# Altium PCB ROS_CAR.PcbDoc (part 3 of 13)
Units mil, origin at the board's own origin, x right, y up, seen from the top; angles counter-clockwise.
Board outline 3937.01 x 3937.01 mil, 2 copper layers (Top Layer, Bottom Layer); 201 components, 155 nets, 998 pads, 0 vias.
Unrouted connection lines stored in the file: 3.
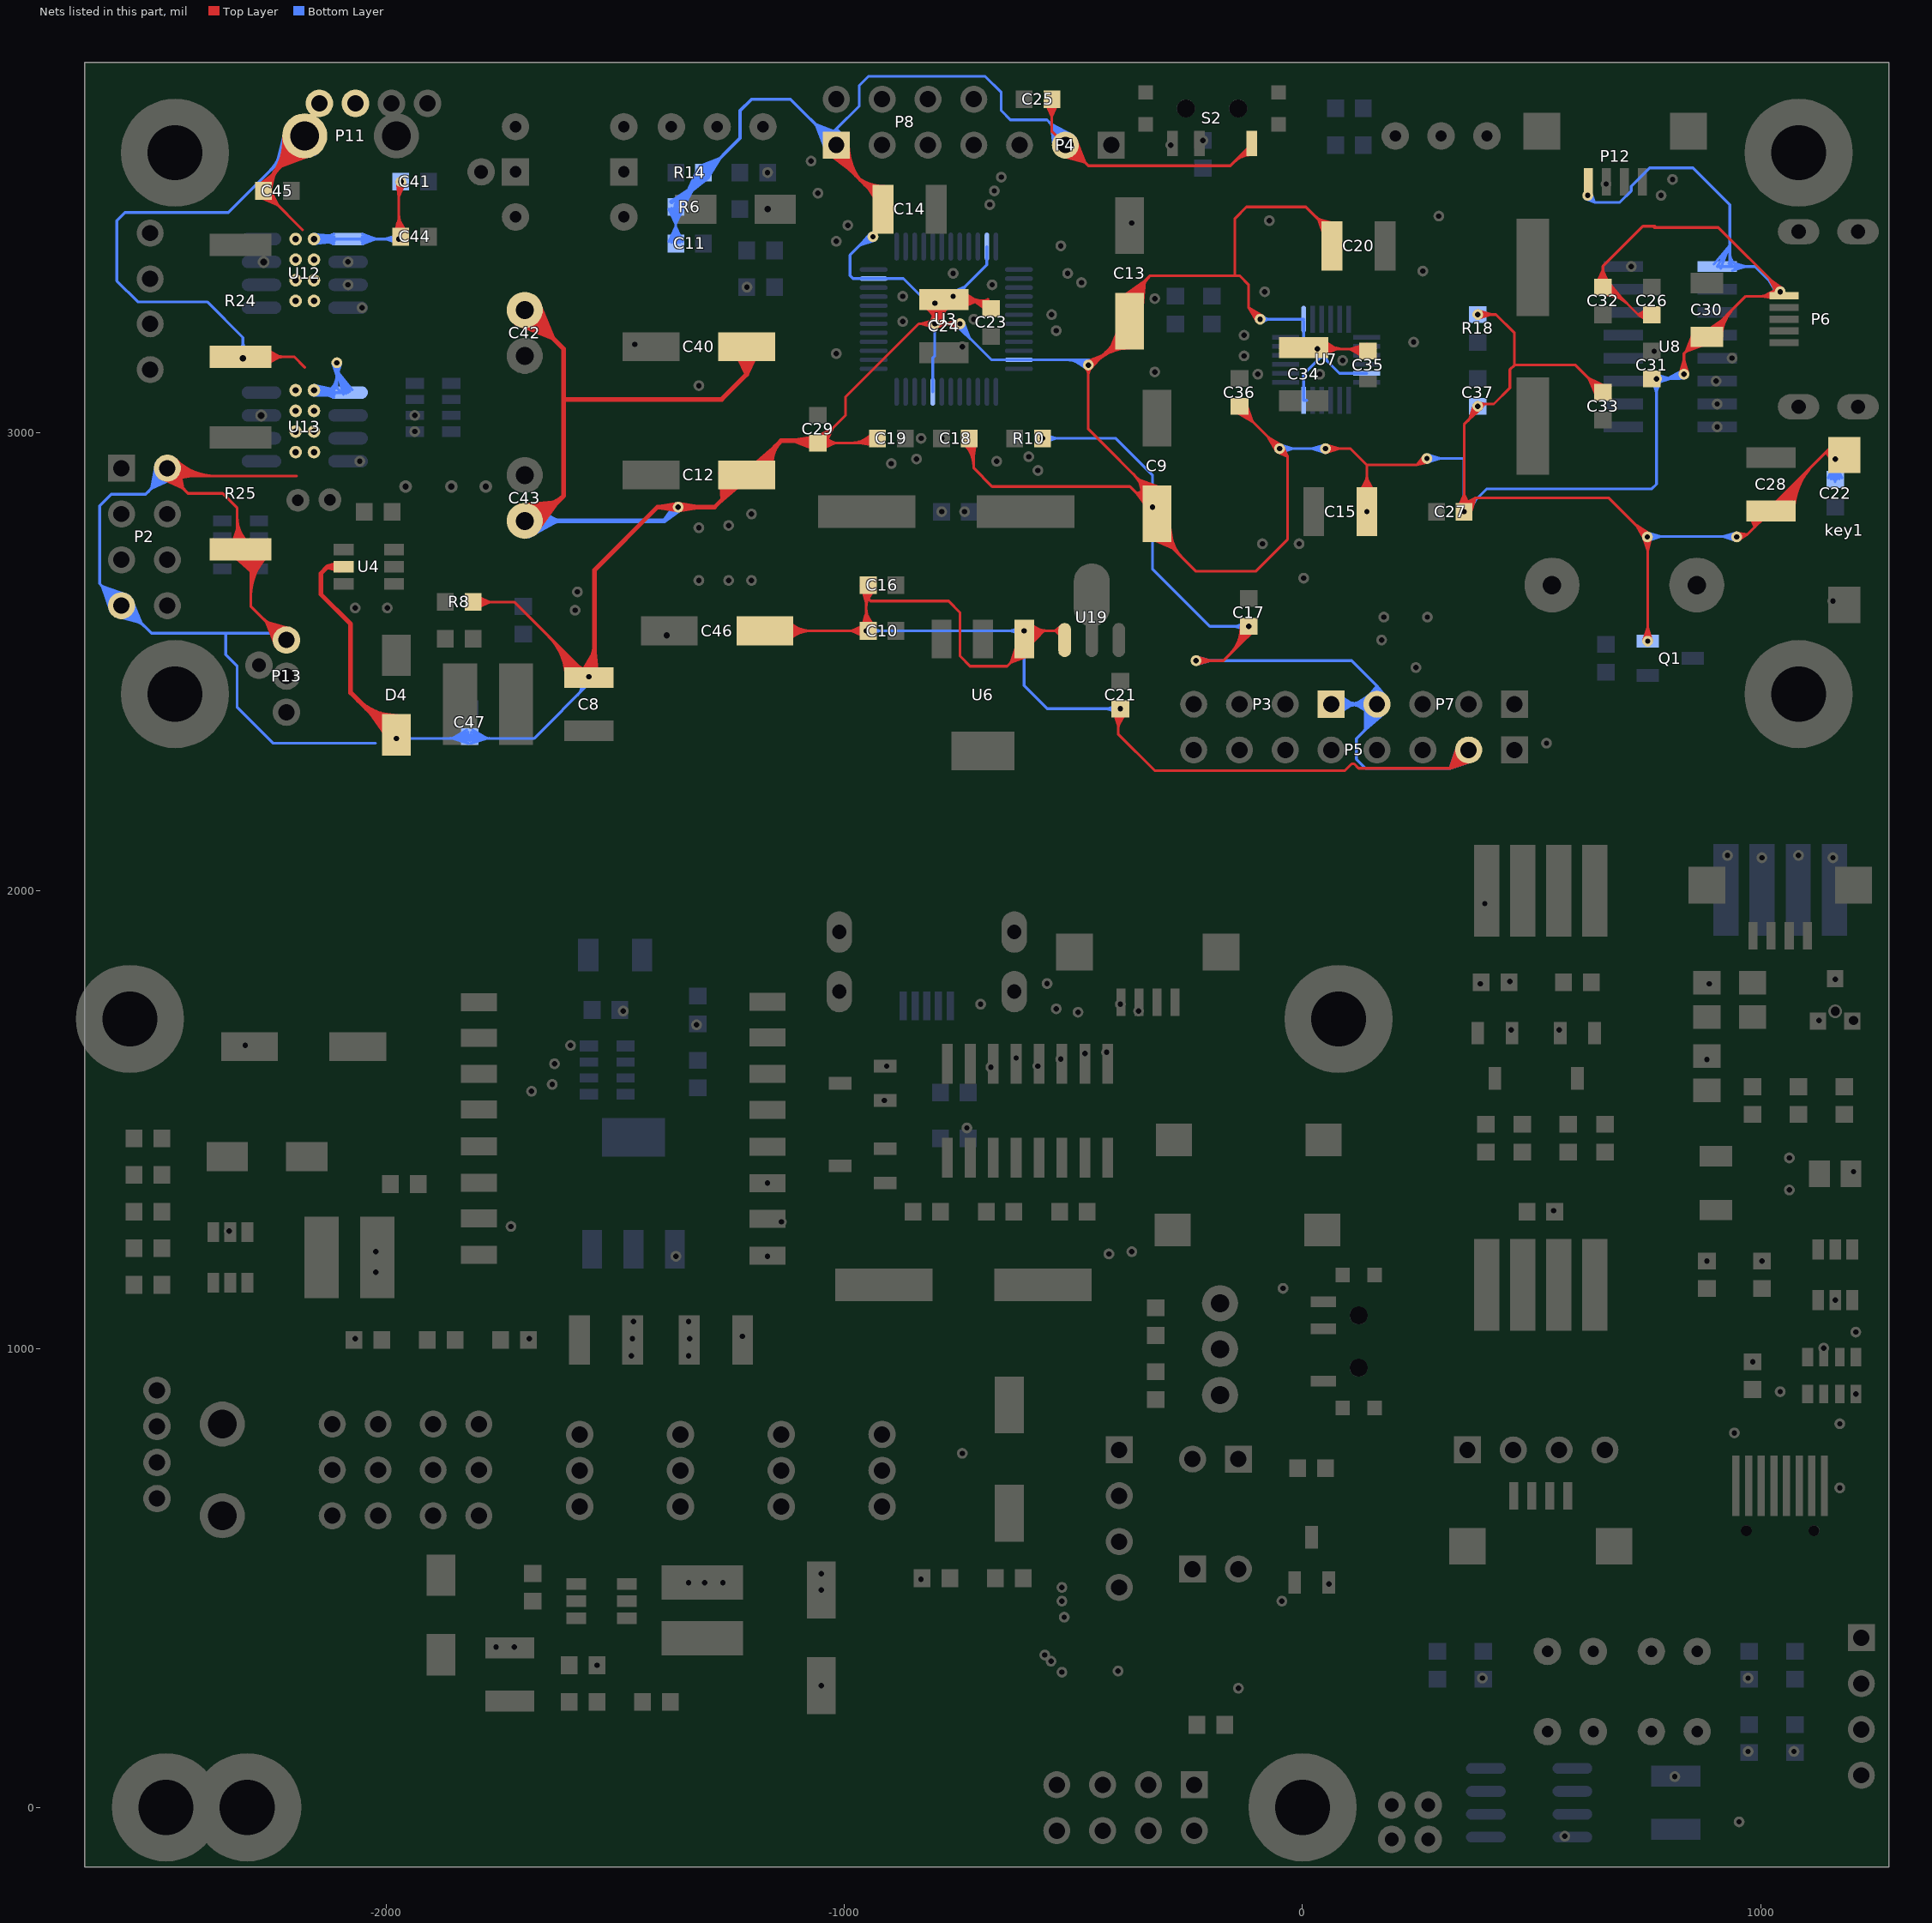
[diagram p3: the nets of this part, all layers, seen from the top]

## Nets (pads, with @x,y where several pads share a name; then routed paths per layer and width w, separated by ;. In a path a pad name is that pad's centre, name@x,y a point inside that pad or via, vN(x,y) a via of type N, cw(c..) or ccw(c..) an arc to the next point about the centre after c; other vN are vias at no path point) (continued)
CGND: (continued)
  Top Layer w6: P2.2@-2494.04,2901.36 -2442.78,2877.38 ; P2.2@-2491.14,2906.77 -2442.78,2877.38 ; P2.2@-2487.72,2911.78 -2442.78,2877.38 ; P2.2@-2483.8,2916.36 -2442.78,2877.38 ; P2.2@-2480.08,2907.79 -2424.09,2905 ; P2.2@-2480.05,2901.72 -2424.09,2905 ; P2.2@-2479.94,2919.63 ccw(c-2444.61,2954.95) -2444.61,2905 ; P2.2@-2479.45,2913.79 -2424.09,2905 ; P2.2@-2479.36,2895.63 -2424.09,2905 ; P2.2@-2477.48,2895.56 cw(c-2477.48,2855.66) -2449.27,2883.87 ; P2.2@-2477.48,2901.56 cw(c-2477.48,2876.14) -2459.51,2894.12 ; P2.2@-2477.48,2912.09 -2432.27,2866.88 -2356.88,2866.88 -2325,2835 R25.2@-2325,2745 ; P2.2@-2475.69,2923.87 ccw(c-2430.13,2969.44) -2430.13,2905 ; P2.2@-2474.27,2929.99 -2424.09,2905 ; P2.2@-2471.45,2928.12 ccw(c-2415.64,2983.93) -2415.64,2905 ; P2.2@-2471.3,2935.23 -2424.09,2905 ; P2.2@-2470.37,2926.79 -2442.78,2877.38 ; P2.2@-2469.09,2920.54 ccw(c-2442.04,2915.55) -2461.49,2896.1 ; P2.2@-2467.75,2940.16 -2424.09,2905 ; P2.2@-2467.21,2932.36 ccw(c-2401.16,2998.41) -2401.16,2905 ; P2.2@-2465,2905 -2195,2905 ; P2.2@-2464.96,2929.45 -2442.78,2877.38 ; P2.2@-2463.65,2944.72 -2424.09,2905 ; P2.2@-2463.19,2919.45 ccw(c-2428.4,2913.04) -2453.42,2888.02 ; P2.2@-2462.97,2936.6 ccw(c-2386.67,3012.9) -2386.67,2905 ; P2.2@-2459.25,2931.53 -2442.78,2877.38 ; P2.2@-2458.72,2940.84 ccw(c-2372.19,3027.38) -2372.19,2905 ; P2.2@-2457.29,2918.37 ccw(c-2414.77,2910.53) -2445.34,2879.95 ; P2.2@-2453.3,2932.99 -2442.78,2877.38 ; P2.2@-2451.39,2917.28 ccw(c-2401.14,2908.01) -2437.27,2871.88 ; R25.2@-2339.02,2746.69 -2325,2788.24 ; R25.2@-2334.85,2732.18 -2295,2696.51 ; R25.2@-2333.09,2745.14 -2325,2788.24 ; R25.2@-2332.76,2760.32 ccw(c-2351.49,2779.05) -2325,2779.05 ; R25.2@-2330.53,2736.48 -2295,2696.51 ; R25.2@-2327.07,2744.44 -2325,2788.24 ; R25.2@-2325.8,2740.24 -2295,2696.51 ; -2325,2771.9 ccw(c-2290.62,2771.9) R25.2@-2314.93,2747.59 ; -2325,2786.39 ccw(c-2276.13,2786.39) R25.2@-2310.69,2751.83 ; -2325,2800.87 ccw(c-2261.65,2800.87) R25.2@-2306.44,2756.07 ; -2325,2815.36 ccw(c-2247.16,2815.36) R25.2@-2302.2,2760.32 ; R25.2@-2321.06,2744.57 -2325,2788.24 ; R25.2@-2320.7,2743.41 -2295,2696.51 ; R24.2@-2317.48,3165.04 -2200.43,3165.04 -2177.48,3142.09 ; R25.2@-2314.16,2746.44 -2295,2696.51 ; R25.2@-2313.96,2745.8 -2325,2788.24 ; R24.2@-2312.56,3166.87 R24.2@-2280.52,3165.04 ; pad.11@-2312.48,3162.09 R24.2@-2280.52,3165.04 ; R24.2@-2311.69,3157.37 R24.2@-2280.52,3165.04 ; R24.2@-2311.66,3172.83 R24.2@-2280.52,3165.04 ; R24.2@-2309.7,3151.67 R24.2@-2280.52,3165.04 ; R24.2@-2309.1,3158.71 cw(c-2293.81,3143.42) R24.2@-2293.81,3165.04 ; R25.2@-2308.44,2748.28 -2295,2696.51 ; R25.2@-2308.25,2747.71 -2325,2788.24 ; R24.2@-2304.86,3154.46 cw(c-2279.33,3128.93) R24.2@-2279.33,3165.04 ; R24.2@-2304.86,3169.71 ccw(c-2293.58,3180.98) R24.2@-2293.58,3165.04 ; R25.2@-2302.83,2750.41 -2325,2788.24 ; R25.2@-2302.51,2749.46 -2295,2696.51 ; R25.2@-2297.76,2753.87 -2325,2788.24 ; R25.2@-2296.44,2749.97 -2295,2696.51 ; -2295,2644.02 cw(c-2173.75,2644.02) R25.2@-2259.49,2729.76 ; -2295,2658.51 cw(c-2188.23,2658.51) R25.2@-2263.73,2734 ; -2295,2672.99 cw(c-2202.72,2672.99) R25.2@-2267.97,2738.25 ; -2295,2687.48 cw(c-2217.2,2687.48) R25.2@-2272.21,2742.49 ; -2295,2701.96 cw(c-2231.69,2701.96) R25.2@-2276.46,2746.73 ; -2295,2716.45 cw(c-2246.17,2716.45) R25.2@-2280.7,2750.97 ; R25.2@-2295,2730.93 cw(c-2260.66,2730.93) R25.2@-2284.94,2755.22 ; R25.2@-2295,2745 -2295,2620 P13.1@-2225,2550 ; C45.2@-2279.1,3538.4 -2242.89,3566.68 ; C45.2@-2276.26,3513.35 -2236.64,3496.24 ; C45.2@-2275.06,3533.88 -2242.89,3566.68 ; R24.2@-2274.76,3165.04 -2232.16,3165.04 ; R24.2@-2274.61,3161.44 -2232.16,3165.04 ; R24.2@-2274.61,3168.64 -2232.16,3165.04 ; R24.2@-2273.68,3155.49 -2232.16,3165.04 ; R24.2@-2273.68,3174.58 -2232.16,3165.04 ; C45.2@-2273.47,3518.73 -2236.64,3496.24 ; R24.2@-2271.91,3149.7 -2232.16,3165.04 ; R24.2@-2271.91,3180.38 -2232.16,3165.04 ; -2271.44,2596.44 ccw(c-2217.48,2650.39) P13.1@-2217.48,2574.09 ; C45.2@-2270.51,3529.96 -2242.89,3566.68 ; C45.2@-2270.49,3528.07 cw(c-2243.91,3528.07) -2262.7,3546.86 ; C45.2@-2269.99,3523.63 -2236.64,3496.24 ; R24.2@-2269.29,3144.14 -2232.16,3165.04 ; R24.2@-2269.29,3185.94 -2232.16,3165.04 ; C45.2@-2267.8,3510.8 cw(c-2267.8,3470.7) -2239.45,3499.05 ; C45.2@-2267.8,3528.07 -2242.89,3566.68 ; C45.2@-2265.42,3528.4 -2236.64,3496.24 ; C45.2@-2264.95,3526.38 -2242.89,3566.68 ; C45.2@-2264.49,3528.07 cw(c-2223.43,3528.07) -2252.46,3557.11 ; C45.2@-2264.31,3511.2 cw(c-2259.98,3492.66) -2246.52,3506.12 cw(c-2231.34,3521.3) C45.2@-2252.62,3524.1 ; C45.2@-2264.29,3511.2 cw(c-2260.06,3493.21) -2246.99,3506.28 cw(c-2232.68,3520.59) C45.2@-2252.67,3523.73 ; R24.2@-2263.73,3154 cw(c-2237.09,3127.36) -2237.09,3165.04 cw(c-2237.09,3202.72) R24.2@-2263.73,3176.07 ; -2261.19,2586.19 ccw(c-2217.48,2629.91) P13.1@-2217.48,2568.09 ; C45.2@-2260.67,3532.09 -2236.64,3496.24 ; -2260.31,2585.31 cw(c-2298.54,2547.09) P13.1@-2244.48,2547.09 ; -2260.29,3549.28 ccw(c-2349.2,3638.19) P11.2@-2223.63,3644.69 ; R24.2@-2259.49,3149.76 cw(c-2222.6,3112.88) -2222.6,3165.04 cw(c-2222.6,3217.2) R24.2@-2259.49,3180.32 ; C45.2@-2259.5,3523.84 -2242.89,3566.68 ; C45.2@-2258.49,3528.07 cw(c-2202.94,3528.07) -2242.22,3567.35 ; C45.2@-2255.41,3535.1 -2236.64,3496.24 ; C45.2@-2253.73,3522.03 -2242.89,3566.68 ; C45.2@-2252.49,3526.1 ccw(c-2218.67,3526.1) -2242.58,3502.19 ; C45.2@-2252.49,3528.07 cw(c-2182.46,3528.07) -2231.98,3577.59 ; -2250.95,2575.95 ccw(c-2217.48,2609.42) P13.1@-2217.48,2562.09 ; -2250.75,3558.81 ccw(c-2331.07,3639.13) P11.2@-2217.64,3645.01 ; -2250.07,2575.07 cw(c-2278.06,2547.09) P13.1@-2238.48,2547.09 ; -2241.22,3568.35 ccw(c-2312.93,3640.07) P11.2@-2211.65,3645.32 ; P13.1@-2239.6,2531.6 -2261.66,2586.66 ; P13.1@-2234.04,2534.17 -2261.66,2586.66 ; -2231.68,3577.89 ccw(c-2294.8,3641.01) P11.2@-2205.66,3645.63 ; -2230.76,3578.8 cw(c-2177.48,3525.52) P11.2@-2177.48,3600.87 ; P13.1@-2228.82,2537.27 -2261.66,2586.66 ; P13.1@-2223.98,2540.86 -2261.66,2586.66 ; -2222.14,3587.42 ccw(c-2276.67,3641.95) P11.2@-2199.66,3645.94 ; -2220.52,3589.05 cw(c-2177.48,3546.01) P11.2@-2177.48,3606.87 ; P11.2@-2220.43,3664.15 -2228.62,3580.94 ; P13.1@-2217.48,2547.09 -2261.66,2586.66 ; P11.2@-2214.27,3663.31 -2228.62,3580.94 ; -2212.61,3596.96 ccw(c-2258.53,3642.89) P11.2@-2193.67,3646.25 ; P13.1@-2212,2554.23 -2261.66,2586.66 ; -2210.28,3599.29 cw(c-2177.48,3566.49) P11.2@-2177.48,3612.87 ; P13.1@-2208.97,2559.44 -2261.66,2586.66 ; P11.2@-2208.25,3662.03 -2228.62,3580.94 ; P13.1@-2206.46,2564.96 -2261.66,2586.66 ; P13.1@-2204.52,2570.77 -2261.66,2586.66 ; P11.2@-2202.39,3660.33 -2228.62,3580.94 ; P11.2@-2196.7,3658.22 -2228.62,3580.94 ; -2182.48,3442.09 -2247.17,3506.77 ; P11.2@-2172.48,3632.09 -2177.48,3632.09 -2267.8,3541.77 C45.2@-2267.8,3527.09 -2247.48,3506.77 ; P11.2@-2161.87,3631.29 -2228.62,3580.94 ; P11.2@-2158.39,3626.31 -2228.62,3580.94 ; P11.2@-2155.27,3621.06 -2228.62,3580.94 ; P11.2@-2152.52,3615.56 -2228.62,3580.94 ; P11.2@-2150.16,3609.82 -2228.62,3580.94 ; C44.2@-1983.05,3429.32 -1972.48,3464.68 ; C44.2@-1981.27,3422.66 -1974.6,3457.6 ; C44.2@-1981.25,3422.93 -1973.92,3453.31 ; C44.2@-1981.19,3423.39 -1972.48,3451.9 C44.2@-1963.77,3423.39 ; C44.2@-1981.17,3423.52 -1972,3452.04 ; C44.2@-1981.14,3423.73 -1971.03,3453.34 ; C44.2@-1981.13,3423.77 -1970.46,3455.52 ; C44.2@-1978.71,3428.32 ccw(c-1993.75,3443.36) -1972.48,3443.36 ccw(c-1951.21,3443.36) C44.2@-1966.25,3428.32 ; C44.2@-1978.62,3438.89 ccw(c-1993.44,3453.71) -1972.48,3453.71 ; C44.2@-1977.1,3428.06 -1972.48,3464.68 ; pad.1@-1976.29,3547.25 -1972.48,3514.21 ; -1972.48,3447.37 ccw(c-1948.5,3447.37) C44.2@-1965.46,3430.41 ; -1972.48,3461.85 ccw(c-1934.01,3461.85) C44.2@-1961.21,3434.65 ; -1972.48,3476.34 ccw(c-1919.53,3476.34) C44.2@-1956.97,3438.89 ; -1972.48,3513.74 cw(c-1934.14,3513.74) pad.1@-1961.25,3540.86 ; -1972.48,3528.23 cw(c-1948.62,3528.23) pad.1@-1965.49,3545.1 ; pad.1@-1972.48,3537.09 pad.1@-1972.48,3422.09 ; C44.2@-1971.09,3427.8 -1972.48,3464.68 ; C44.2@-1967.79,3428.07 -1972.48,3464.68 ; pad.1@-1967.48,3547.09 -1972.48,3514.21 ; C44.2@-1964.54,3428.64 -1972.48,3464.68 ; C44.2@-1963.82,3423.7 -1974.6,3457.6 ; C44.2@-1963.82,3423.73 -1973.92,3453.31 ; C44.2@-1963.71,3422.92 -1971.03,3453.34 ; C44.2@-1963.75,3423.24 -1972,3452.04 ; C44.2@-1963.69,3422.72 -1970.46,3455.52 ; pad.1@-1959.02,3544.62 -1972.48,3514.21 ; C44.2@-1958.79,3430.41 -1972.48,3464.68 ; C44.2@-1953.34,3433.12 -1972.48,3464.68 ; R8.2@-1810.16,2630.08 -1720.47,2630.08 pad.1@-1557.48,2467.09 ; R8.2@-1810.01,2626.78 -1773.85,2630.08 ; R8.2@-1810.01,2633.38 -1773.85,2630.08 ; R8.2@-1808.96,2620.85 -1773.85,2630.08 ; R8.2@-1808.96,2639.31 -1773.85,2630.08 ; R8.2@-1806.93,2615.12 -1773.85,2630.08 ; R8.2@-1806.93,2645.04 -1773.85,2630.08 ; R8.2@-1803.58,2623.5 cw(c-1787.69,2607.61) -1787.69,2630.08 cw(c-1787.69,2652.55) R8.2@-1803.58,2636.66 ; R8.2@-1799.33,2619.26 cw(c-1773.2,2593.12) -1773.2,2630.08 cw(c-1773.2,2667.03) R8.2@-1799.33,2640.9 ; C43.2@-1697.48,2807.09 C43.2@-1687.48,2807.09 ; -1645.13,2554.73 cw(c-1734.7,2465.16) C8.2@-1608.02,2465.16 ; -1634.88,2544.49 cw(c-1714.22,2465.16) C8.2@-1602.02,2465.16 ; -1624.64,2534.25 cw(c-1693.73,2465.16) -1596.02,2465.16 -1591.96,2501.57 ; -1614.4,2524.01 cw(c-1673.25,2465.16) C8.2@-1590.02,2465.16 ; C8.2@-1607.73,2468.54 -1591.96,2501.57 ; -1604.16,2513.76 cw(c-1652.76,2465.16) C8.2@-1584.02,2465.16 ; C8.2@-1601.97,2466.36 -1591.96,2501.57 ; -1593.91,2503.52 cw(c-1632.28,2465.16) C8.2@-1578.02,2465.16 ; C8.2@-1588.19,2465.16 -1591.96,2501.57 ; -1583.67,2493.28 cw(c-1611.79,2465.16) C8.2@-1572.02,2465.16 ; C8.2@-1580.53,2466.79 -1591.96,2501.57 ; C8.2@-1574.95,2469.16 -1591.96,2501.57 ; C8.2@-1573.43,2483.04 cw(c-1591.31,2465.16) C8.2@-1566.02,2465.16 ; C8.2@-1566.29,2467.09 ccw(c-1587.56,2467.09) -1572.52,2482.13 ccw(c-1557.48,2497.17) C8.2@-1557.48,2475.9 ; C8.2@-1564.45,2461.7 -1582.02,2491.63 C8.2@-1552.09,2474.06 ; C8.2@-1564.15,2461.33 -1583.82,2490.9 ; C8.2@-1563.48,2460.63 C8.2@-1569.75,2472.47 ; C8.2@-1563.19,2472.79 cw(c-1570.82,2465.16) C8.2@-1560.02,2465.16 ; C8.2@-1556.79,2475.87 C8.2@-1569.75,2472.47 ; C8.2@-1552.43,2474.3 -1583.82,2490.9 ; C46.2@-1173.15,2567.09 C10.1@-947.8,2567.09 -984.1,2567.09 ; C46.2@-1142.43,2562.6 -1093.14,2567.09 ; C46.2@-1142.43,2571.58 -1093.14,2567.09 ; C46.2@-1141.52,2556.65 -1093.14,2567.09 ; C46.2@-1141.52,2577.52 -1093.14,2567.09 ; C46.2@-1139.89,2550.82 -1093.14,2567.09 ; C46.2@-1139.89,2583.35 -1093.14,2567.09 ; C46.2@-1137.53,2545.18 -1093.14,2567.09 ; C46.2@-1137.53,2588.99 -1093.14,2567.09 ; C46.2@-1134.43,2539.8 -1093.14,2567.09 ; C46.2@-1134.43,2594.38 -1093.14,2567.09 ; C46.2@-1130.97,2555.42 cw(c-1102.81,2527.26) -1102.81,2567.09 cw(c-1102.81,2606.91) C46.2@-1130.97,2578.75 ; C46.2@-1126.73,2551.18 cw(c-1088.33,2512.78) -1088.33,2567.09 cw(c-1088.33,2621.4) C46.2@-1126.73,2582.99 ; C46.2@-1122.49,2546.94 cw(c-1073.84,2498.29) -1073.84,2567.09 cw(c-1073.84,2635.88) C46.2@-1122.49,2587.24 ; C29.2@-1065.43,2989.2 -1026.45,3007.81 ; C29.2@-1062.45,2983.93 -1026.45,3007.81 ; C29.2@-1058.78,2979.16 -1026.45,3007.81 ; C29.2@-1056.5,2986.08 ccw(c-1056.5,3006.17) C29.2@-1042.29,2991.96 ; C29.2@-1056.5,2992.08 ccw(c-1056.5,3026.66) -1032.05,3002.21 ; C29.2@-1056.35,2973.47 -1020.19,2976.77 ; C29.2@-1056.35,2980.08 -1020.19,2976.77 ; C29.2@-1055.3,2967.54 -1020.19,2976.77 ; C29.2@-1055.3,2986 -1020.19,2976.77 ; C29.2@-1054.03,2974.56 -1026.45,3007.81 ; C29.2@-1053.27,2961.81 -1020.19,2976.77 ; C29.2@-1053.27,2991.73 -1020.19,2976.77 ; C29.2@-1049.91,2970.19 cw(c-1034.03,2954.3) -1034.03,2976.77 cw(c-1034.03,2999.24) C29.2@-1049.91,2983.35 ; C29.2@-1049.15,2971.06 -1026.45,3007.81 ; C29.2@-1047.19,2976.77 cw(c-1022.34,2976.77) C29.2@-1039.91,2994.34 ; C29.2@-1045.67,2965.95 cw(c-1019.54,2939.82) -1019.54,2976.77 cw(c-1019.54,3013.73) C29.2@-1045.67,2987.6 ; C29.2@-1043.79,2968.24 -1026.45,3007.81 ; C29.2@-1041.19,2976.77 cw(c-1001.86,2976.77) -1029.67,3004.58 ; P8.1@-1037.56,3609.75 -987.75,3572.35 ; P8.1@-1033.66,3614.45 -987.75,3572.35 ; P8.1@-1029.35,3618.71 -987.75,3572.35 ; P8.1@-1024.68,3622.51 -987.75,3572.35 ; P8.1@-1020.95,3627.09 ccw(c-968.98,3627.09) -1005.73,3590.34 ; P8.1@-1014.95,3627.09 ccw(c-948.5,3627.09) -995.49,3580.09 ; P8.1@-1009.73,3630.64 -987.75,3572.35 ; P8.1@-1008.95,3627.09 ccw(c-928.01,3627.09) -985.25,3569.85 ; P8.1@-1003.99,3632.49 -987.75,3572.35 ; P8.1@-1002.95,3627.09 ccw(c-907.52,3627.09) -975,3559.61 ; P8.1@-998.07,3633.78 -987.75,3572.35 ; P8.1@-996.95,3627.09 ccw(c-887.04,3627.09) -964.76,3549.37 ; P8.1@-992.01,3634.5 -987.75,3572.35 ; P8.1@-990.95,3627.09 ccw(c-866.55,3627.09) -954.52,3539.12 ; -987.28,2976.77 ccw(c-987.28,3045.58) C19.1@-938.62,2996.93 ; -979.52,3564.13 ccw(c-915.55,3628.1) C14.2@-915.55,3537.63 ; -972.79,2976.77 ccw(c-972.79,3031.1) C19.1@-934.38,2992.68 ; -969.28,3553.88 ccw(c-915.55,3607.61) C14.2@-915.55,3531.63 ; C10.1@-963.05,2569.32 -952.48,2604.62 ; C16.2@-963.05,2664.86 -952.48,2629.29 ; C16.2@-962.55,2662.02 -947.8,2637.4 ; C10.1@-961.25,2567.91 -953.79,2600.23 ; C10.1@-961.19,2568.39 -952.48,2596.9 ; C10.1@-961.18,2568.47 -952.19,2596.96 ; C10.1@-961.16,2568.61 -951.58,2597.63 ; C10.1@-961.15,2568.65 -951.22,2598.88 ; C10.1@-960.61,2563.7 C10.1@-951.02,2552.12 ; C10.1@-960.61,2570.47 C10.1@-951.02,2582.05 ; -959.04,3543.64 ccw(c-915.55,3587.13) C14.2@-915.55,3525.63 ; C10.1@-958.71,2560.86 ccw(c-973.75,2545.82) -973.75,2567.09 ccw(c-973.75,2588.36) -958.71,2573.32 ccw(c-973.75,2588.36) -952.48,2588.36 ccw(c-931.21,2588.36) C10.1@-946.25,2573.32 ; C10.1@-958.62,2556.26 ccw(c-984.75,2530.13) -984.75,2567.09 ccw(c-984.75,2604.04) C10.1@-958.62,2577.91 ; C10.1@-958.62,2578.89 ccw(c-973.44,2593.71) -952.48,2593.71 ; C16.2@-958.62,2655.28 cw(c-973.44,2640.46) -952.48,2640.46 ; -958.31,2976.77 ccw(c-958.31,3016.61) C19.1@-930.13,2988.44 ; C10.1@-957.1,2568.06 -952.48,2604.62 ; C16.2@-957.1,2666.11 -952.48,2629.29 ; C16.2@-956.98,2664.59 -947.8,2637.4 ; C16.2@-956.32,2653.39 cw(c-967.05,2637.4) -947.8,2637.4 ; C10.1@-954.38,2560.51 ccw(c-970.26,2544.62) -970.26,2567.09 ccw(c-970.26,2589.56) C10.1@-954.38,2573.67 ; C10.1@-953.82,2558.38 -982.48,2567.24 ; C10.1@-953.82,2575.8 -982.48,2566.94 ; C10.1@-953.76,2575.8 -983.68,2566.98 ; C10.1@-953.69,2558.36 -983.68,2566.98 ; C10.1@-953.69,2575.81 -983.68,2567.2 ; C10.1@-952.48,2557.09 -952.48,2662.4 C16.2@-947.8,2667.09 -947.8,2637.4 ; -952.48,2587.37 ccw(c-928.5,2587.37) C10.1@-945.46,2570.41 ; -952.48,2601.85 ccw(c-914.02,2601.85) C10.1@-941.21,2574.65 ; -952.48,2616.34 ccw(c-899.53,2616.34) C10.1@-936.97,2578.89 ; -952.48,2617.84 cw(c-899.53,2617.84) C16.2@-936.97,2655.28 ; -952.48,2632.32 cw(c-914.02,2632.32) C16.2@-941.21,2659.52 ; -952.48,2646.81 cw(c-928.5,2646.81) C16.2@-945.46,2663.76 ; C10.1@-951.78,2575.87 C10.1@-938.79,2570.41 ; C10.1@-951.09,2567.8 -952.48,2604.62 ; C16.2@-951.1,2665.91 -947.8,2637.4 ; C16.2@-951.09,2666.37 -952.48,2629.29 ; C10.1@-948.99,2557.86 -984.1,2567.09 ; C10.1@-948.99,2576.32 -984.1,2567.09 ; -948.79,3533.4 ccw(c-915.55,3566.64) C14.2@-915.55,3519.63 ; C10.1@-947.95,2563.78 -984.1,2567.09 ; C10.1@-947.95,2570.39 -984.1,2567.09 ; C10.1@-947.83,2559.6 C10.1@-938.79,2570.41 ; C10.1@-947.8,2568.07 -952.48,2604.62 ; C10.1@-944.54,2568.64 -952.48,2604.62 ; C16.2@-944.54,2665.54 -952.48,2629.29 ; C16.2@-944.49,2665.91 -947.8,2637.4 ; C10.1@-943.85,2565.33 C10.1@-951.02,2552.12 ; C10.1@-943.85,2568.84 C10.1@-951.02,2582.05 ; C19.1@-943.82,2976.77 ccw(c-943.82,3002.13) C19.1@-925.89,2984.2 ; C10.1@-943.77,2568.39 -952.48,2596.9 ; C10.1@-943.8,2568.6 -953.79,2600.23 ; C10.1@-943.8,2568.61 -953.37,2597.61 ; C10.1@-943.71,2567.96 -951.22,2598.88 ; C10.1@-943.73,2568.1 -951.58,2597.63 ; C10.1@-943.73,2568.12 -952.48,2604.62 ; C10.1@-943.75,2568.3 -952.19,2596.96 ; C16.2@-939.27,2653.39 ccw(c-928.54,2637.4) -947.8,2637.4 ; C16.2@-938.78,2663.78 -952.48,2629.29 ; C16.2@-938.61,2664.59 -947.8,2637.4 ; -938.55,3523.16 ccw(c-915.55,3546.15) C14.2@-915.55,3513.63 ; C19.1@-934.23,2999.99 -966.13,2976.77 ; C10.1@-933.35,2573.13 -952.48,2604.62 ; C16.2@-933.34,2661.08 -952.48,2629.29 ; C16.2@-933.04,2662.02 -947.8,2637.4 ; C19.1@-931.05,2994.82 -966.13,2976.77 ; C19.1@-928.71,2989.28 -966.13,2976.77 ; C14.2@-928.42,3502.7 -946.83,3531.44 ; C19.1@-927.8,2986.1 -966.13,2976.77 ; C19.1@-927.13,2970.81 -966.13,2976.77 ; C19.1@-927.15,2982.86 -966.13,2976.77 ; C19.1@-926.68,2976.86 -966.13,2976.77 ; C14.2@-923.54,3506.5 -946.83,3531.44 ; C14.2@-919.49,3511.02 -946.83,3531.44 ; C19.1@-917.48,2987.09 -927.8,2976.77 C29.2@-1057.48,2976.77 -997.48,3036.77 -997.48,3077.09 -837.48,3237.09 pad.1@-752.48,3237.09 ; C14.2@-917.48,3502.09 -1017.48,3602.09 P8.1@-1017.48,3627.09 -987.75,3572.35 ; C14.2@-915.55,3517.8 -946.83,3531.44 ; C14.2@-913.26,3525.29 -946.83,3531.44 ; C14.2@-913.25,3537.5 -946.83,3531.44 ; C14.2@-912.7,3531.33 -946.83,3531.44 ; C24.2@-823.45,3273.18 cw(c-845.9,3236.02) pad.1@-802.48,3236.02 ; C24.2@-820.34,3278.32 cw(c-839.47,3246.65) pad.1@-802.48,3246.65 ; C24.2@-817.24,3283.45 cw(c-833.05,3257.29) -802.48,3257.29 ; C24.2@-814.14,3288.59 cw(c-826.62,3267.92) C24.2@-802.48,3267.92 ; pad.1@-811.19,3238.39 -802.48,3266.9 pad.1@-793.77,3238.39 ; pad.1@-811.18,3238.47 -802.2,3266.9 ; C24.2@-811.19,3280.78 -802.48,3252.28 C24.2@-793.77,3280.78 ; pad.1@-811.03,3239.24 -799.51,3266.96 ; pad.1@-810.8,3239.98 -796.72,3267.06 ; C24.2@-810.54,3285.64 C24.2@-801.85,3294.42 ; pad.1@-810.4,3240.94 -792.83,3267.02 ; pad.1@-809.87,3241.88 -788.6,3266.6 ; pad.1@-809.37,3242.59 -785.07,3265.94 ; pad.1@-808.76,3243.27 -781.23,3264.94 ; pad.1@-808.71,3230.86 ccw(c-823.75,3215.82) -823.75,3237.09 ccw(c-823.75,3258.36) -808.71,3243.32 ccw(c-823.75,3258.36) -802.48,3258.36 ccw(c-781.21,3258.36) -796.25,3243.32 ccw(c-781.21,3258.36) -781.21,3237.09 ccw(c-781.21,3215.82) pad.1@-796.25,3230.86 ; C24.2@-808.71,3275.86 cw(c-823.75,3260.82) -802.48,3260.82 cw(c-781.21,3260.82) -796.25,3275.86 cw(c-781.21,3260.82) -781.21,3282.09 cw(c-781.21,3303.36) C24.2@-796.25,3288.32 ; C24.2@-808.35,3288.66 C24.2@-795.78,3293.97 ; C24.2@-806.18,3290.08 C24.2@-789.87,3292.77 ; pad.1@-803.78,3228.37 -832.29,3237.09 pad.1@-803.78,3245.8 ; C24.2@-802.48,3268.13 cw(c-791.16,3268.13) C24.2@-799.16,3276.13 ; pad.1@-801.18,3228.37 -772.67,3237.09 pad.1@-801.18,3245.8 ; C24.2@-801.18,3273.37 -772.67,3282.09 C24.2@-801.18,3290.8 ; C24.2@-795.2,3277.12 C24.2@-789.87,3292.77 ; pad.1@-794.86,3232.67 -781.23,3264.94 ; pad.1@-794.41,3233.56 -785.07,3265.94 ; pad.1@-794.07,3234.45 -788.6,3266.6 ; C24.2@-794.1,3284.81 C24.2@-801.85,3294.42 ; C24.2@-793.82,3280.47 C24.2@-795.78,3293.97 ; pad.1@-793.8,3235.58 -792.83,3267.02 ; pad.1@-793.75,3238.31 -802.2,3266.9 ; pad.1@-793.68,3236.69 -796.72,3267.06 ; pad.1@-793.68,3237.51 -799.51,3266.96 ; C24.2@-782.48,3290.16 pad.1@-802.48,3245.44 ; C24.2@-775.61,3286.4 pad.1@-802.48,3245.44 ; C24.2@-770.78,3282.78 pad.1@-802.48,3245.44 ; C24.2@-770.78,3300.03 C24.2@-772.48,3282.09 ; C24.2@-769.98,3284.59 ccw(c-773.84,3288.45) C24.2@-769.49,3291.75 ; C24.2@-768.99,3285.58 cw(c-762.48,3279.08) C24.2@-762.48,3288.28 ; C24.2@-767.48,3287.09 C24.2@-772.48,3282.09 ; C24.2@-766.39,3278.56 pad.1@-802.48,3245.44 ; C24.2@-763.58,3288.34 C24.2@-729.07,3288.45 ; C24.2@-762.42,3288.28 C24.2@-732.17,3292.89 ; C24.2@-760.03,3305.55 C24.2@-732.17,3292.89 ; C24.2@-759.81,3305.48 C24.2@-750.44,3297.88 ; C24.2@-759.2,3305.27 C24.2@-729.07,3288.45 ; C24.2@-758.73,3289.11 C24.2@-750.44,3297.88 ; C24.2@-756.57,3290.56 C24.2@-772.48,3282.09 ; pad.1@-753.71,3230.86 ccw(c-768.75,3215.82) -768.75,3237.09 ccw(c-768.75,3258.36) pad.1@-753.71,3243.32 ; C24.2@-751.77,3290.16 -710.89,3287.09 ; C24.2@-751.61,3282.32 -710.89,3287.09 ; C24.2@-750.47,3276.38 -710.89,3287.09 ; pad.1@-748.78,3228.37 -777.29,3237.09 ; pad.1@-748.78,3245.8 -777.29,3237.09 ; C24.2@-748.43,3270.61 -710.89,3287.09 ; C24.2@-748.42,3303.58 -710.89,3287.09 ; pad.1@-747.48,3237.09 -777.29,3237.09 ; C24.2@-747.48,3287.09 C23.2@-687.17,3287.09 ; C24.2@-746.23,3295.7 ccw(c-725.44,3316.49) -725.44,3287.09 ; C24.2@-745.55,3308.99 -710.89,3287.09 ; C24.2@-741.99,3280.38 cw(c-725.79,3264.17) -725.79,3287.09 ; C24.2@-741.99,3299.94 ccw(c-710.96,3330.97) -710.96,3287.09 ; C18.1@-740.94,2979.42 -717.48,2948.63 ; C18.1@-737.99,2975.28 cw(c-787.5,2925.77) -717.48,2925.77 ; C24.2@-737.75,3276.13 cw(c-711.3,3249.69) -711.3,3287.09 ; C24.2@-737.75,3304.18 ccw(c-696.47,3345.46) C23.2@-696.47,3287.09 ; C18.1@-735.83,2982.71 -717.48,2948.63 ; C18.1@-733.75,2979.52 cw(c-773.02,2940.25) -717.48,2940.25 ; C18.1@-730.33,2985.14 -717.48,2948.63 ; C18.1@-729.5,2983.76 cw(c-758.53,2954.74) -717.48,2954.74 ; C18.1@-727.17,2986.1 -717.48,2948.63 ; C18.1@-727.17,2987.09 -727.17,2996.77 -717.48,2987.09 -717.48,2922.09 -677.48,2882.09 -376.81,2882.09 C9.2@-329.65,2834.92 ; C18.1@-725.26,2988.01 cw(c-744.05,2969.22) C18.1@-717.48,2969.22 ; -724.32,3287.09 cw(c-724.32,3231.55) C23.2@-685.05,3270.82 ; C18.1@-723.93,2986.79 -717.48,2948.63 ; -719.17,3286.79 cw(c-715.67,3262.12) C23.2@-692.62,3271.59 ; C18.1@-717.94,2987.33 -717.48,2948.63 ; -717.06,3287.09 C23.2@-684.98,3263.55 ; C18.1@-711.88,2986.93 -717.48,2948.63 ; -711.54,3287.87 cw(c-708.31,3265.15) C23.2@-687.07,3273.87 ; -707.97,3285.59 cw(c-713.44,3252.29) C23.2@-686.02,3271.97 ; -707.9,3283.96 ccw(c-702.04,3301.12) C23.2@-689.25,3288.26 ; -706.96,3283.64 cw(c-715.25,3259.34) C23.2@-692.2,3270.66 ; -706.52,3285.36 ccw(c-702.36,3310.69) -687.39,3289.84 ; -700.26,3282.87 cw(c-705.73,3261.08) C23.2@-686.45,3272.62 ; C23.2@-698.75,3280.84 ccw(c-694.44,3293.48) C23.2@-685.03,3284 ; C23.2@-691.6,3269.54 ccw(c-723.3,3250.55) -714.31,3286.4 ccw(c-705.31,3322.24) -686.33,3290.53 ; -639.36,2495.21 ccw(c-672.61,2528.46) U6.1@-625.58,2528.46 ; -637.36,2497.21 cw(c-606.93,2466.77) U6.1@-606.93,2509.81 ; -629.11,2505.45 ccw(c-652.13,2528.46) U6.1@-619.58,2528.46 ; U6.1@-627.12,2507.45 cw(c-606.93,2487.26) U6.1@-606.93,2515.81 ; U6.1@-622.84,2538.2 -636.43,2498.13 ; U6.1@-617.22,2535.83 -636.43,2498.13 ; U6.1@-612.48,2562.09 U6.1@-597.8,2576.77 ; U6.1@-612.05,2532.71 -636.43,2498.13 ; U6.1@-610.54,2567.43 -564.13,2567.09 ; U6.1@-610.19,2561.36 -564.13,2567.09 ; U6.1@-609.06,2555.44 -564.13,2567.09 ; U6.1@-607.02,2558.29 -574.46,2564.41 ; U6.1@-606.93,2528.46 -636.43,2498.13 ; U6.1@-606.93,2549.13 -564.13,2567.09 ; U6.1@-606.67,2558.31 -576.84,2565.51 ; U6.1@-606.21,2575.81 -577.67,2567.19 ; U6.1@-606.18,2558.37 -577.67,2567.09 U6.1@-606.18,2575.8 ; U6.1@-606.15,2558.38 -577.67,2567.19 ; U6.1@-605.77,2575.73 -576.84,2565.51 ; U6.1@-605.61,2575.7 -574.46,2564.41 ; U6.1@-603.92,2543.2 -564.13,2567.09 ; U6.1@-602.54,2523.46 -636.43,2498.13 ; U6.1@-602.48,2532.09 -644.57,2490 -725.39,2490 -747.48,2512.09 -747.48,2607.09 -772.48,2632.09 -942.48,2632.09 -947.8,2637.4 ; U6.1@-602.22,2574.51 ccw(c-584.31,2592.42) -584.31,2567.09 ; U6.1@-601.25,2560.86 cw(c-586.21,2545.82) -586.21,2567.09 cw(c-586.21,2588.36) U6.1@-601.25,2573.32 ; U6.1@-600.49,2538.24 -564.13,2567.09 ; U6.1@-599.28,2518.38 -636.43,2498.13 ; U6.1@-597.98,2560.86 cw(c-582.94,2545.81) -582.94,2567.09 ; U6.1@-597.98,2578.75 ccw(c-569.82,2606.91) -569.82,2567.09 ; U6.1@-596.75,2512.83 -636.43,2498.13 ; U6.1@-596.4,2533.73 -564.13,2567.09 ; U6.1@-593.74,2556.61 cw(c-568.45,2531.33) -568.45,2567.09 ; U6.1@-593.74,2582.99 ccw(c-555.34,2621.39) -555.34,2567.09 ; C25.2@-562.13,3722.88 -547.17,3689.8 ; C25.2@-557.99,3715.28 cw(c-584.12,3689.15) -547.17,3689.15 cw(c-510.21,3689.15) C25.2@-536.34,3715.28 ; C25.2@-556.4,3724.91 -547.17,3689.8 ; C25.2@-553.75,3719.52 cw(c-569.63,3703.63) -547.17,3703.63 cw(c-524.7,3703.63) C25.2@-540.58,3719.52 ; C25.2@-550.47,3725.95 -547.17,3689.8 ; C25.2@-547.17,3726.1 -547.17,3689.8 ; C25.2@-547.17,3727.09 -547.17,3656.77 P4.2@-517.48,3627.09 ; C25.2@-543.86,3725.95 -547.17,3689.8 ; C25.2@-537.94,3724.91 -547.17,3689.8 ; C25.2@-532.2,3722.88 -547.17,3689.8 ; P4.2@-530.03,3603.71 -474.18,3588.79 ; P4.2@-528.13,3609.54 -474.18,3588.79 ; P4.2@-525.66,3615.08 -474.18,3588.79 ; U19.1@-523.72,2580.43 -539.06,2567.09 ; P4.2@-522.64,3620.3 -474.18,3588.79 ; U19.1@-520.45,2575.28 -539.06,2567.09 ; U19.1@-520.02,2559.97 -539.06,2567.09 ; U19.1@-519.06,2547.09 -539.06,2567.09 ; U19.1@-519.06,2570.71 -539.06,2567.09 ; U19.1@-518.76,2565.94 -539.06,2567.09 ; P4.2@-517.21,3612.56 cw(c-516.38,3568.1) -484.94,3599.55 ; P4.2@-517.1,3606.56 cw(c-516.02,3548.51) -474.96,3589.57 ; P4.2@-511.37,3633.04 -474.18,3588.79 ; P4.2@-506.56,3636.67 -474.18,3588.79 ; P4.2@-501.37,3639.8 -474.18,3588.79 ; P4.2@-496.95,3627.09 ccw(c-459.47,3627.09) -485.97,3600.58 ; P4.2@-495.81,3642.39 -474.18,3588.79 ; P4.2@-490.95,3627.09 ccw(c-438.98,3627.09) -475.73,3590.34 ; pad.1@-473.71,3140.86 cw(c-488.75,3125.82) -467.48,3125.82 cw(c-446.21,3125.82) pad.1@-461.25,3140.86 ; pad.1@-471.46,3154.95 -437.22,3167.35 ; pad.1@-467.48,3149.9 ccw(c-467.48,3180.83) -445.61,3158.96 ; pad.1@-467.48,3155.9 ccw(c-467.48,3201.31) -435.37,3169.2 ; pad.1@-461.73,3140.41 -437.22,3167.35 ; -451.46,3153.1 cw(c-377.48,3079.12) C13.2@-377.48,3183.75 ; -441.22,3163.35 cw(c-377.48,3099.61) C13.2@-377.48,3189.75 ; -430.98,3173.59 cw(c-377.48,3120.09) C13.2@-377.48,3195.75 ; -420.74,3183.83 cw(c-377.48,3140.58) C13.2@-377.48,3201.75 ; -415.63,3188.94 ccw(c-438.94,3212.24) C13.2@-405.98,3212.24 ; C21.2@-413.7,2395.24 -402.48,2360.17 ; -410.49,3194.07 cw(c-377.48,3161.06) C13.2@-377.48,3207.75 ; C21.2@-409.29,2385.95 cw(c-425.72,2369.51) -402.48,2369.51 ; C21.2@-407.77,2396.61 -402.48,2360.17 ; C21.2@-406.28,2396.72 -400.57,2365.21 ; C21.2@-406.29,2396.84 -401.06,2367.2 ; C21.2@-406.29,2397.03 -401.68,2367.44 ; C21.2@-406.29,2397.26 -402.48,2366.64 ; C21.2@-406.28,2397.42 -403.13,2364.66 ; -402.48,2350.12 cw(c-351.81,2350.12) C21.2@-387.64,2385.95 ; -402.48,2363.74 cw(c-364.14,2363.74) C21.2@-391.25,2390.86 ; -402.48,2364.61 cw(c-366.3,2364.61) C21.2@-391.88,2390.19 ; -402.48,2378.23 cw(c-378.62,2378.23) C21.2@-395.49,2395.1 ; C21.2@-402.48,2397.09 -402.48,2342.09 -322.48,2262.09 92.52,2262.09 107.52,2277.09 112.52,2277.09 122.52,2267.09 322.52,2267.09 ; C21.2@-401.76,2396.98 -402.48,2360.17 ; C13.2@-399.22,3230.66 -417.37,3187.19 ; C21.2@-398.46,2396.77 -402.48,2360.17 ; C13.2@-398.44,3292.58 -344.69,3329.87 ; C21.2@-397.93,2388.29 C21.2@-383.93,2391.98 ; C21.2@-395.2,2396.26 -402.48,2360.17 ; C13.2@-394.72,3287.72 -344.69,3329.87 ; C13.2@-393.65,3227.89 -417.37,3187.19 ; C21.2@-392.01,2403.99 C21.2@-383.93,2391.98 ; C13.2@-390.6,3283.27 -344.69,3329.87 ; C21.2@-389.42,2394.6 -402.48,2360.17 ; C21.2@-389.03,2394.58 -401.68,2367.44 ; C21.2@-388.98,2394.77 -401.06,2367.2 ; C21.2@-388.95,2394.88 -402.48,2360.17 ; C21.2@-388.91,2395.04 -400.57,2365.21 ; C13.2@-388.56,3224.46 -417.37,3187.19 ; C13.2@-386.11,3279.24 -344.69,3329.87 ; C13.2@-384.02,3220.46 -417.37,3187.19 ; C13.2@-382.48,3267.09 -382.48,3292.09 -332.48,3342.09 ; C13.2@-381.29,3275.65 -344.69,3329.87 ; C13.2@-380.05,3215.93 -417.37,3187.19 ; C13.2@-378.94,3272.91 cw(c-346.56,3280.86) C13.2@-370.14,3304.43 ; C13.2@-377.48,3227.09 -457.48,3147.09 pad.1@-467.48,3147.09 ; C13.2@-377.48,3301.76 ccw(c-377.48,3313.06) -369.5,3305.07 ; C13.2@-375.27,3208.33 -417.37,3187.19 ; C13.2@-373.51,3271.15 -344.69,3329.87 ; C13.2@-373.11,3274.34 cw(c-334.47,3283.82) -362.61,3311.96 ; C13.2@-372.92,3202.79 -417.37,3187.19 ; C13.2@-371.29,3196.95 -417.37,3187.19 ; C13.2@-370.41,3190.89 -417.37,3187.19 ; C13.2@-370.34,3184.66 -417.37,3187.19 ; -369.1,2909.1 cw(c-424.94,2853.27) C9.2@-345.98,2853.27 ; C13.2@-368.01,3268.75 -344.69,3329.87 ; C13.2@-367.29,3275.77 cw(c-322.38,3286.79) -355.08,3319.49 ; C13.2@-362.28,3266.87 -344.69,3329.87 ; C13.2@-361.46,3277.2 cw(c-310.28,3289.76) -347.54,3327.02 ; -358.93,2898.93 ccw(c-317.48,2940.39) C9.2@-317.48,2881.76 ; -358.86,2898.86 cw(c-404.46,2853.27) C9.2@-339.98,2853.27 ; C13.2@-356.36,3265.51 -344.69,3329.87 ; C13.2@-355.63,3278.63 cw(c-298.19,3292.73) -340.01,3334.55 ; C13.2@-350.3,3264.7 -344.69,3329.87 ; -349.91,2855.19 ccw(c-327.48,2877.62) C9.2@-327.48,2845.9 ; C13.2@-349.81,3280.06 cw(c-286.09,3295.7) -332.48,3342.08 ; -348.69,2888.69 ccw(c-317.48,2919.9) C9.2@-317.48,2875.76 ; -348.62,2888.62 cw(c-383.97,2853.27) C9.2@-333.98,2853.27 ; C9.2@-342.71,2840.03 -355.98,2895.98 ; C9.2@-339.67,2844.95 ccw(c-327.48,2857.14) C9.2@-327.48,2839.9 ; C9.2@-339.46,2844.74 cw(c-347.11,2837.09) C9.2@-336.29,2837.09 ; C9.2@-338.45,2878.45 ccw(c-317.48,2899.42) C9.2@-317.48,2869.76 ; C9.2@-338.38,2878.38 cw(c-363.49,2853.27) C9.2@-327.98,2853.27 ; C9.2@-336.81,2841.77 -355.98,2895.98 ; C9.2@-336.19,2838.39 -327.48,2866.9 C9.2@-318.77,2838.39 ; C9.2@-336.07,2835.12 C9.2@-339.26,2868.76 ; C9.2@-335.86,2834.36 C9.2@-341.19,2865.03 ; C9.2@-335.51,2833.46 C9.2@-345.48,2866.28 ; C9.2@-334.97,2769.74 -282.09,2746.7 ; C9.2@-334.37,2831.6 -352.79,2861.78 ; C9.2@-334.27,2831.47 -355.97,2864.57 ; C9.2@-334.21,2831.4 -352.52,2859.87 ; C9.2@-333.94,2831.1 -353.6,2858.77 ; C9.2@-333.95,2831.11 -353.79,2859.06 ; C9.2@-333.89,2829.97 -361.7,2866.98 ; C9.2@-333.71,2843.32 ccw(c-348.75,2858.36) -327.48,2858.36 ccw(c-306.21,2858.36) C9.2@-321.25,2843.32 ; C9.2@-333.7,2830.84 -355.67,2858.95 ; C9.2@-332.81,2844.1 C9.2@-319.02,2849.04 ; C9.2@-332.21,2775.24 -282.09,2746.7 ; C9.2@-331.19,2844.1 -355.98,2895.98 ; C9.2@-329.16,2834.04 -361.7,2866.98 ; C9.2@-328.93,2780.36 -282.09,2746.7 ; C9.2@-325.89,2846.98 -355.98,2895.98 ; C9.2@-325.15,2785.08 -282.09,2746.7 ; C9.2@-325.09,2838.63 -361.7,2866.98 ; C9.2@-322.98,2844.66 -355.67,2858.95 ; C9.2@-322.78,2844.54 -353.6,2858.77 ; C9.2@-322.75,2844.52 -353.79,2859.06 ; C9.2@-322.45,2844.32 -352.52,2859.87 ; C9.2@-322.16,2844.11 -352.79,2861.78 ; C9.2@-322.11,2844.07 -355.97,2864.57 ; C9.2@-321.7,2843.66 -361.7,2866.98 ; C9.2@-320.92,2789.35 -282.09,2746.7 ; C9.2@-320.94,2850.39 -355.98,2895.98 ; C9.2@-320.64,2842.64 C9.2@-345.48,2866.28 ; C9.2@-320.2,2842.05 C9.2@-341.19,2865.03 ; C9.2@-319.69,2841.21 C9.2@-339.26,2868.76 ; C9.2@-319.09,2834.4 C9.2@-319.02,2849.04 ; C9.2@-317.83,2881.76 -361.7,2866.98 ; C9.2@-317.48,2763.75 cw(c-317.48,2719.48) -286.17,2750.78 ; C9.2@-317.48,2769.75 cw(c-317.48,2739.96) C9.2@-296.42,2761.02 ; C9.2@-317.48,2822.76 -317.48,2782.09 -232.48,2697.09 -102.48,2697.09 -32.48,2767.09 -32.48,2947.09 ; C9.2@-316.36,2857.62 -361.7,2866.98 ; C9.2@-316.24,2875.73 -361.7,2866.98 ; C9.2@-315.53,2863.58 -361.7,2866.98 ; C9.2@-315.48,2869.64 -361.7,2866.98 ; C9.2@-314.26,2856.41 -355.98,2895.98 ; C9.2@-313.83,2794.86 -282.09,2746.7 ; C9.2@-310.36,2860.98 -355.98,2895.98 ; C9.2@-308.64,2797.9 -282.09,2746.7 ; C9.2@-306.98,2792.24 ccw(c-257.12,2792.24) -292.38,2756.99 ; C9.2@-306.94,2865.96 -355.98,2895.98 ; C9.2@-304.04,2871.31 -355.98,2895.98 ; C9.2@-303.14,2800.4 -282.09,2746.7 ; C9.2@-301.7,2877 -355.98,2895.98 ; C9.2@-300.98,2792.24 ccw(c-236.64,2792.24) -282.14,2746.74 ; C9.2@-297.37,2802.32 -282.09,2746.7 ; C9.2@-294.98,2792.24 ccw(c-216.15,2792.24) -271.89,2736.5 ; C9.2@-291.36,2803.63 -282.09,2746.7 ; C9.2@-288.98,2792.24 ccw(c-195.67,2792.24) -261.65,2726.26 ; pad.1@-232.48,2502.09 -172.48,2502.09 -117.48,2557.09 ; pad.1@-231.18,2493.37 -202.67,2502.09 pad.1@-231.18,2510.8 ; pad.1@-226.25,2495.86 cw(c-211.21,2480.82) -211.21,2502.09 cw(c-211.21,2523.36) pad.1@-226.25,2508.32 ; -159.21,2515.36 ccw(c-220.63,2576.77) C17.2@-133.77,2576.77 ; -150.04,3589.53 cw(c-110.87,3550.36) S2.1@-110.87,3605.76 ; -148.97,2525.6 ccw(c-200.14,2576.77) C17.2@-127.77,2576.77 ; -147.48,3342.09 -147.48,3467.09 -122.48,3492.09 7.52,3492.09 62.52,3437.09 C20.2@62.52,3422.09 ; C36.1@-146.36,3045.06 -109.06,3023.66 ; C36.1@-142.98,3050.09 -109.06,3023.66 ; -139.79,3599.77 cw(c-110.87,3570.85) S2.1@-110.87,3611.76 ; C36.1@-138.96,3054.57 -109.06,3023.66 ; -138.73,2535.84 ccw(c-179.66,2576.77) C17.2@-121.77,2576.77 ; C36.1@-137.48,3056.77 -137.48,3052.09 -32.48,2947.09 ; C36.1@-136.5,3041.46 cw(c-136.5,3018.2) -120.04,3034.65 ; C36.1@-136.5,3056.77 -109.06,3023.66 ; C36.1@-133.87,3058.78 -109.06,3023.66 ; C17.2@-133.18,2580.99 -137.91,2536.66 ; -129.55,3610.02 cw(c-110.87,3591.33) S2.1@-110.87,3617.76 ; C36.1@-128.73,3061.9 -109.06,3023.66 ; -128.48,2546.08 ccw(c-159.17,2576.77) C17.2@-115.77,2576.77 ; C17.2@-127.22,2579.94 -137.91,2536.66 ; C36.1@-127.19,3056.77 ccw(c-91.03,3056.77) -116.6,3031.21 ; C17.2@-125.88,2579.43 -131.09,2548.42 ; C17.2@-125.79,2579.7 -131.92,2549.02 ; C17.2@-125.69,2579.97 -133.02,2549.01 ; C17.2@-125.54,2580.33 -135.24,2547.48 ; C17.2@-123.35,2570.2 cw(c-135.06,2557.09) -117.48,2557.09 ; C36.1@-123.16,3064.29 -109.06,3023.66 ; C17.2@-121.49,2578.1 -137.91,2536.66 ; C17.2@-121.25,2561.94 cw(c-122.48,2557.09) -117.48,2557.09 ; C36.1@-121.19,3056.77 ccw(c-70.55,3056.77) -106.36,3020.96 ; C17.2@-118.46,2576.77 -137.91,2536.66 ; -118.24,2556.33 ccw(c-138.68,2576.77) C17.2@-109.77,2576.77 ; C17.2@-115.54,2575.22 -137.91,2536.66 ; S2.1@-115.55,3622.03 -134.82,3604.75 ; C17.2@-113.71,2561.94 ccw(c-112.48,2557.09) -117.48,2557.09 ; C17.2@-111.61,2570.2 ccw(c-99.9,2557.09) -117.48,2557.09 ; S2.1@-110.87,3614.57 -134.82,3604.75 ; S2.1@-110.87,3628.7 -157.48,3582.09 -467.48,3582.09 -512.48,3627.09 P4.2@-517.48,3627.09 ; C17.2@-110.6,2571.27 -135.24,2547.48 ; C17.2@-110.56,2571.86 -137.91,2536.66 ; C17.2@-110.46,2571.45 -133.02,2549.01 ; C17.2@-110.31,2571.64 -131.92,2549.02 ; C17.2@-110.15,2571.88 -131.09,2548.42 ; C17.2@-109.91,2572.27 -130.6,2546.07 ; C17.2@-109.81,2572.44 -131.55,2542.87 ; S2.1@-108.96,3605.96 -134.82,3604.75 ; C17.2@-106.04,2567.83 -137.91,2536.66 ; pad.1@-101.29,3247.09 ccw(c-122.56,3247.09) -107.52,3262.13 ccw(c-92.48,3277.17) pad.1@-92.48,3255.9 ; pad.1@-99.45,3241.7 -117.02,3271.63 pad.1@-87.09,3254.06 ; pad.1@-92.48,3247.09 -117.48,3272.09 -117.48,3322.09 -137.48,3342.09 -332.48,3342.09 ; pad.1@-58.89,2964.69 ccw(c-80.16,2964.69) -65.12,2979.73 ccw(c-50.08,2994.77) pad.1@-50.08,2973.5 ; pad.1@-57.05,2959.3 -74.62,2989.23 ; pad.1@-55.11,2957.45 -32.48,2947.09 ; pad.1@-50.08,2955.88 cw(c-50.08,2934.61) -35.04,2949.65 cw(c-20,2964.69) pad.1@-41.27,2964.69 ; pad.1@-50.08,2964.69 -74.62,2989.23 ; pad.1@-44.69,2971.66 -74.62,2989.23 ; pad.1@-42.85,2969.72 -32.48,2947.09 ; 26.09,3473.52 ccw(c64.45,3511.88) C20.2@64.45,3457.63 ; 32.45,3467.15 cw(c3.1,3437.8) C20.2@44.61,3437.8 ; C34.2@33.09,3190.88 66.16,3184.33 ; C34.2@33.11,3173.3 65.72,3179.89 ; C34.2@33.23,3185.49 74.14,3182.09 ; C34.2@33.33,3177.66 74.14,3182.09 ; C34.2@33.45,3173.32 63.01,3180.88 ; C34.2@33.53,3190.84 62.74,3183.04 ; C34.2@33.82,3173.37 62.33,3182.09 C34.2@33.82,3190.8 ; C34.2@34.08,3173.41 62.74,3183.04 ; C34.2@34.14,3190.75 63.01,3180.88 ; C34.2@34.25,3173.45 66.16,3184.33 ; C34.2@34.26,3190.72 65.72,3179.89 ; C34.2@34.42,3171.71 74.14,3182.09 ; C34.2@34.62,3193.2 74.14,3182.09 ; 36.33,3463.28 ccw(c64.45,3491.4) C20.2@64.45,3451.63 ; C34.2@36.41,3165.91 74.14,3182.09 ; C34.2@36.68,3198.89 74.14,3182.09 ; C34.2@38.75,3175.86 cw(c53.79,3160.82) 53.79,3182.09 cw(c53.79,3203.36) C34.2@38.75,3188.32 ; C34.2@38.77,3191.03 ccw(c60.36,3212.63) 60.36,3182.09 ; C34.2@39.6,3204.28 74.14,3182.09 ; C20.2@42.7,3456.91 cw(c23.58,3437.8) C20.2@50.61,3437.8 ; C34.2@43.01,3175.71 cw(c58.41,3160.31) 58.41,3182.09 ; C34.2@43.01,3195.27 ccw(c74.85,3227.11) 74.85,3182.09 ; C20.2@46.57,3453.03 ccw(c64.45,3470.91) C20.2@64.45,3445.63 ; C34.2@47.25,3171.47 cw(c72.89,3145.83) 72.89,3182.09 ; C34.2@47.25,3199.52 ccw(c89.33,3241.6) 89.33,3182.09 ; C20.2@47.89,3426.88 34.73,3464.88 ; pad.1@50.12,2964.69 104.92,2964.69 140.59,2929.02 ; pad.1@51.42,2955.97 79.93,2964.69 pad.1@51.42,2973.4 ; C20.2@53.51,3429.32 34.73,3464.88 ; pad.1@56.35,2958.46 cw(c71.39,2943.42) 71.39,2964.69 cw(c71.39,2985.96) pad.1@56.35,2970.92 ; C20.2@58.63,3432.55 34.73,3464.88 ; C20.2@64.45,3437.8 34.73,3464.88 ; C20.2@69.14,3444.07 34.73,3464.88 ; C20.2@71.87,3449.47 34.73,3464.88 ; C20.2@73.78,3455.3 34.73,3464.88 ; 93.27,3182.09 cw(c93.27,3129.14) C35.1@130.71,3166.58 ; 107.76,3182.09 cw(c107.76,3143.62) C35.1@134.95,3170.82 ; 115.89,3182.09 ccw(c115.89,3203.05) C35.1@130.71,3188.23 ; C15.2@121.35,2862.61 140.59,2898.63 ; 122.24,3182.09 cw(c122.24,3158.11) C35.1@139.2,3175.06 ; C15.2@126.57,2871.82 ccw(c92.71,2905.68) 140.59,2905.68 ccw(c188.48,2905.68) C15.2@154.62,2871.82 ; C15.2@126.96,2860.14 140.59,2898.63 ; C35.1@127.52,3182.09 pad.1@32.52,3182.09 ; C15.2@130.81,2867.58 ccw(c107.19,2891.2) 140.59,2891.2 ccw(c173.99,2891.2) C15.2@150.37,2867.58 ; C15.2@131.88,2828.39 140.59,2856.9 C15.2@149.3,2828.39 ; C15.2@132.79,2858.55 140.59,2898.63 ; C15.2@134.36,2833.32 ccw(c119.32,2848.36) 140.59,2848.36 ccw(c161.86,2848.36) C15.2@146.82,2833.32 ; C35.1@136.64,3162.9 103.75,3182.09 ; C35.1@139.27,3168.37 103.75,3182.09 ; C35.1@140.33,3192.66 103.75,3182.09 ; C15.2@140.59,2827.09 140.59,2929.02 ; C15.2@140.59,2857.8 140.59,2898.63 ; C35.1@140.99,3174.14 103.75,3182.09 ; C35.1@141.54,3177.4 103.75,3182.09 ; C35.1@141.54,3186.71 103.75,3182.09 ; C35.1@141.8,3180.7 103.75,3182.09 ; C15.2@148.39,2858.55 140.59,2898.63 ; C15.2@154.23,2860.14 140.59,2898.63 ; C15.2@159.83,2862.61 140.59,2898.63 ; pad.1@262.88,2945.07 cw(c242.09,2949.58) 253.6,2931.69 cw(c265.12,2913.8) pad.1@269.62,2934.59 ; pad.1@265.54,2949.71 249.45,2929.02 ; pad.1@271.49,2943.2 249.45,2929.02 ; pad.1@274.95,2935.1 249.45,2929.02 ; P5.2@336.1,2304.66 cw(c289.26,2300.35) 322.52,2267.09 ; C27.2@337.87,2831.3 352.83,2864.38 ; P5.2@339.89,2320.92 322.52,2267.09 ; C27.2@342.01,2838.89 ccw(c315.88,2865.03) 352.83,2865.03 ccw(c389.79,2865.03) C27.2@363.66,2838.89 ; P5.2@342.08,2305.21 cw(c305.83,2301.88) 331.57,2276.14 cw(c357.31,2250.39) P5.2@360.64,2286.65 ; C27.2@342.52,2822.09 377.52,2857.09 ; C27.2@343.41,2840.13 377.52,2857.09 ; C27.2@343.6,2829.26 352.83,2864.38 ; C27.2@343.76,2828.02 351.53,2859.43 ; C27.2@343.79,2828.28 352.18,2857.21 ; C27.2@343.85,2828.64 353.48,2857.34 ; C27.2@343.85,2828.68 354.06,2859.72 ; P5.2@345.61,2318.73 322.52,2267.09 ; C27.2@346.29,2833.32 ccw(c330.49,2849.12) 352.83,2849.12 ; C27.2@346.25,2834.65 ccw(c330.37,2850.54) 352.83,2850.54 ccw(c375.3,2850.54) C27.2@359.42,2834.65 ; C27.2@346.33,2833.36 374.45,2854.89 ; C27.2@346.54,2833.56 373.84,2852.77 ; C27.2@346.54,2834.92 377.52,2857.09 ; C27.2@346.63,2833.64 374.34,2852.61 ; C27.2@346.69,2833.69 375.72,2853.46 ; P5.2@348.05,2305.76 cw(c322.4,2303.4) 340.62,2285.18 cw(c358.83,2266.96) P5.2@361.19,2292.62 ; C27.2@349.53,2828.22 352.83,2864.38 ; C27.2@350.41,2830.32 377.52,2857.09 ; P5.2@351.01,2315.95 322.52,2267.09 ; C27.2@352.52,2835.9 ccw(c352.52,2845.1) C27.2@359.03,2838.59 ; C27.2@352.83,2827.09 352.83,3017.4 397.52,3062.09 ; C27.2@352.83,2843.38 ccw(c352.83,2869.88) 371.57,2851.14 ; 352.83,2847.6 ccw(c373.03,2847.6) C27.2@358.75,2833.32 ; C27.2@355.33,2827.09 cw(c374.19,2827.09) C27.2@360.85,2840.42 ; C27.2@355.44,2826.04 377.52,2857.09 ; P5.2@356.05,2312.64 322.52,2267.09 ; C27.2@356.14,2828.22 352.83,2864.38 ; C27.2@359.81,2822.14 375.72,2853.46 ; C27.2@359.91,2822.29 374.34,2852.61 ; C27.2@359.98,2822.4 373.84,2852.77 ; P5.2@360.09,2280.67 ccw(c355.79,2233.82) 322.52,2267.09 ; C27.2@360.06,2822.53 374.45,2854.89 ; 360.41,3024.97 ccw(c328.29,3057.09) pad.1@373.71,3057.09 ; C27.2@360.61,2822.95 377.52,2857.09 ; C27.2@361.22,2828.47 352.18,2857.21 ; C27.2@361.21,2828.55 351.53,2859.43 ; C27.2@361.27,2828.09 353.48,2857.34 ; C27.2@361.33,2827.09 cw(c394.67,2827.09) 371.1,2850.66 ; C27.2@361.3,2827.86 354.06,2859.72 ; C27.2@362.08,2829.15 cw(c385.23,2831.84) 368.75,2848.32 ; C27.2@362.06,2829.26 352.83,2864.38 ; P5.2@362.52,2307.09 322.52,2267.09 ; C27.2@366.25,2820.7 377.52,2857.09 ; C27.2@367.8,2831.3 352.83,2864.38 ; C27.2@368.04,2829.84 cw(c400.94,2833.67) 377.52,2857.09 ; P5.2@368.08,2300.62 322.52,2267.09 ; 370.65,3035.22 ccw(c348.78,3057.09) pad.1@379.71,3057.09 ; P5.2@371.39,2295.58 322.52,2267.09 ; P5.2@374.16,2290.18 322.52,2267.09 ; pad.1@374.58,3060.9 363.89,3028.45 ; P5.2@376.36,2284.45 322.52,2267.09 ; pad.1@382.17,3065.89 397.52,3062.09 ; pad.1@382.52,3257.4 422.2,3257.4 462.52,3217.09 462.52,3147.09 ; pad.1@383.82,3248.69 412.33,3257.4 pad.1@383.82,3266.12 ; pad.1@387.52,3049.84 397.52,3062.09 ; pad.1@388.75,3251.17 cw(c403.79,3236.13) 403.79,3257.4 cw(c403.79,3278.67) pad.1@388.75,3263.63 ; pad.1@389.22,3051.37 363.89,3028.45 ; pad.1@392.52,3057.09 pad.1@382.52,3057.09 ; 627.7,3115.21 cw(c599.89,3087.4) C33.1@639.22,3087.4 ; 630.08,3112.84 ccw(c654.53,3137.29) C33.1@654.53,3102.71 ; C33.1@637.94,3104.97 cw(c620.38,3087.4) C33.1@645.22,3087.4 ; C33.1@640.32,3102.59 ccw(c654.53,3116.8) C33.1@654.53,3096.71 ; C32.1@640.55,3320.63 655.51,3353.71 ; C33.1@641.82,3078.87 624.48,3118.44 ; C32.1@644.69,3328.23 ccw(c618.56,3354.36) 655.51,3354.36 ccw(c692.47,3354.36) C32.1@666.34,3328.23 ; C32.1@646.28,3318.59 655.51,3353.71 ; C33.1@647.18,3081.69 624.48,3118.44 ; C32.1@648.93,3323.98 ccw(c633.04,3339.87) 655.51,3339.87 ccw(c677.98,3339.87) C32.1@662.09,3323.98 ; C32.1@650.92,3303.15 695.79,3293.82 ; C33.1@652.07,3085.19 624.48,3118.44 ; C32.1@652.21,3317.55 655.51,3353.71 ; C32.1@652.54,3308.98 695.79,3293.82 ; C33.1@654.53,3087.4 624.48,3118.44 ; C32.1@654.9,3314.51 695.79,3293.82 ; C33.1@655.51,3087.4 595.83,3147.09 462.52,3147.09 ; C32.1@656.5,3302.09 cw(c656.5,3227.22) 709.44,3280.16 ; C32.1@656.5,3308.09 cw(c656.5,3247.7) 699.2,3290.41 ; C32.1@656.5,3314.09 cw(c656.5,3268.19) 688.96,3300.65 ; C32.1@656.5,3317.4 695.79,3293.82 ; C32.1@656.5,3320.09 cw(c656.5,3288.67) 678.72,3310.89 ; C33.1@656.81,3089.79 624.48,3118.44 ; C32.1@658.3,3320.17 695.79,3293.82 ; C32.1@658.82,3317.55 655.51,3353.71 ; C33.1@660.48,3094.56 624.48,3118.44 ; C32.1@662.07,3324.85 695.79,3293.82 ; C33.1@663.46,3099.83 624.48,3118.44 ; C32.1@664.74,3318.59 655.51,3353.71 ; C32.1@666.45,3329.03 695.79,3293.82 ; C32.1@670.47,3320.63 655.51,3353.71 ; 736.36,2789.82 cw(c718.64,2772.09) pad.1@743.71,2772.09 ; 740.17,2786.01 ccw(c752.52,2798.37) pad.1@752.52,2780.9 ; pad.1@743.84,2770.56 753.31,2742.25 ; pad.1@744.59,2545.79 753.31,2574.3 pad.1@762.02,2545.79 ; pad.1@745.38,2766.93 728.86,2797.32 ; pad.1@746.29,2765.86 cw(c729.35,2748.91) 753.31,2748.91 ; pad.1@747.08,2550.72 ccw(c732.04,2565.76) 753.31,2565.76 ccw(c774.58,2565.76) pad.1@759.54,2550.72 ; C26.1@748.82,3248.24 ccw(c732.84,3237.52) 732.84,3256.77 ; C26.1@748.82,3265.3 cw(c732.84,3276.02) 732.84,3256.77 ; pad.1@753.31,2544.49 753.31,2772.87 669.09,2857.09 377.52,2857.09 ; 753.31,2752.72 cw(c771.89,2752.72) pad.1@758.75,2765.86 ; C26.1@757.45,3242.02 732.83,3256.77 ; C26.1@757.45,3271.52 732.83,3256.77 ; pad.1@758.13,2778.88 728.86,2797.32 ; C26.1@760.03,3247.59 732.83,3256.77 ; C26.1@760.03,3265.96 732.83,3256.77 ; pad.1@761.27,2771.02 753.31,2742.25 ; C26.1@761.35,3253.47 732.83,3256.77 ; C26.1@761.35,3260.07 732.83,3256.77 ; C26.1@761.54,3256.77 732.83,3256.77 ; C26.1@762.52,3256.77 732.83,3256.77 ; 767.52,3447.09 907.52,3447.09 pad.1@1042.52,3312.09 ; 769.53,3450.08 742.94,3450.08 655.51,3362.65 C32.1@655.51,3317.4 672.2,3317.4 732.83,3256.77 ; pad.1@823.81,3128.39 832.52,3156.9 pad.1@841.23,3128.39 ; pad.1@826.29,3133.32 ccw(c811.25,3148.36) 832.52,3148.36 ccw(c853.79,3148.36) pad.1@838.75,3133.32 ; pad.1@832.52,3127.09 832.52,3172.09 868.86,3208.43 C30.2@882.52,3208.43 882.52,3212.09 967.52,3297.09 1032.52,3297.09 pad.1@1042.52,3307.09 ; 835.67,3175.24 cw(c869.33,3141.58) C30.2@869.33,3189.18 ; 836.81,3176.38 ccw(c804.77,3208.43) C30.2@850.09,3208.43 ; 845.92,3185.48 cw(c869.33,3162.07) C30.2@869.33,3195.18 ; 847.06,3186.62 ccw(c825.25,3208.43) C30.2@856.09,3208.43 ; C30.2@853.27,3219.02 836.36,3175.92 ; C30.2@858.78,3216.43 836.36,3175.92 ; C30.2@863.86,3213.17 836.36,3175.92 ; C30.2@869.33,3208.43 836.36,3175.92 ; C30.2@874,3202.88 836.36,3175.92 ; C30.2@877.18,3197.76 836.36,3175.92 ; C30.2@879.7,3192.21 836.36,3175.92 ; C30.2@881.34,3221.23 915.25,3244.82 ; C30.2@885.2,3216.48 915.25,3244.82 ; C30.2@889.65,3212.4 915.25,3244.82 ; C30.2@895.71,3208.43 915.25,3244.82 ; C30.2@896.95,3208.43 cw(c940.64,3208.43) 909.75,3239.31 ; C30.2@902.37,3205.57 915.25,3244.82 ; C30.2@902.95,3208.43 cw(c961.12,3208.43) 919.99,3249.56 ; C30.2@908.23,3204.11 915.25,3244.82 ; C30.2@908.95,3208.43 cw(c981.61,3208.43) 930.23,3259.8 ; C30.2@914.32,3203.52 915.25,3244.82 ; C30.2@914.95,3208.43 cw(c1002.09,3208.43) 940.48,3270.04 ; pad.1@947.29,2780.89 970.59,2777.09 ; pad.1@947.52,2772.09 970.59,2777.09 ; pad.1@950,2770.76 cw(c960.57,2765.09) 960.57,2777.09 ; pad.1@950.96,2763.98 970.59,2777.09 ; pad.1@952.52,2777.09 970.59,2777.09 ; pad.1@955.29,2767.92 cw(c970.59,2759.72) 970.59,2777.09 ; C28.1@972.18,2826.16 986.96,2793.45 ; C28.1@978,2828.21 986.96,2793.45 ; C28.1@983.98,2829.22 986.96,2793.45 ; C28.1@991.81,2829.02 986.96,2793.45 ; 997.11,3297.09 ccw(c997.11,3352.5) pad.1@1036.29,3313.32 ; C28.1@999.41,2827.12 986.96,2793.45 ; C28.1@1004.9,2824.54 986.96,2793.45 ; C28.1@1009.96,2821.01 986.96,2793.45 ; 1011.59,3297.09 ccw(c1011.59,3338.02) pad.1@1040.53,3309.07 ; 1012.78,3297.09 ccw(c1012.78,3312.89) P6.1@1023.96,3301.72 ; C28.1@1017.52,2832.09 1142.52,2957.09 ; 1018.49,3297.09 cw(c1018.49,3289.36) P6.1@1023.96,3294.82 ; C28.1@1019.06,2829.02 cw(c1030.2,2829.02) C28.1@1022.33,2836.89 ; C28.1@1022.52,2829.02 970.59,2777.09 ; 1023.94,3330.66 cw(c1000.37,3307.09) pad.1@1033.71,3307.09 ; C28.1@1025.06,2829.02 cw(c1050.69,2829.02) C28.1@1032.57,2847.14 ; P6.1@1026.08,3297.09 ccw(c1026.08,3323.53) P6.1@1044.77,3304.83 ; P6.1@1026.72,3303.1 1001.51,3297.09 ; P6.1@1027.17,3293.4 1001.51,3297.09 ; P6.1@1027.4,3298.27 1001.51,3297.09 ; C28.1@1031.06,2829.02 cw(c1071.17,2829.02) 1042.81,2857.38 ; C28.1@1034.09,2834.21 1053.56,2868.13 ; 1034.19,3320.42 cw(c1020.85,3307.09) pad.1@1039.71,3307.09 ; P6.1@1035.04,3302.42 1020.41,3334.2 ; 1036.01,3318.59 ccw(c1042.52,3325.1) pad.1@1042.52,3315.9 ; C28.1@1037.06,2829.02 cw(c1091.66,2829.02) 1053.05,2867.62 ; pad.1@1039.23,3315.26 1005.9,3297.09 ; C28.1@1039.63,2831.58 1053.56,2868.13 ; C28.1@1043.06,2829.02 cw(c1112.14,2829.02) 1063.3,2877.86 ; P6.1@1043.84,3298.37 1005.9,3297.09 ; C28.1@1045.44,2829.87 1053.56,2868.13 ; P6.1@1046.91,3295.65 pad.1@1042.52,3307.09 ; pad.1@1048.59,3313.47 1020.41,3334.2 ; C28.1@1049.06,2829.02 cw(c1132.63,2829.02) 1073.54,2888.11 ; P6.1@1051.02,3298.27 pad.1@1042.52,3307.09 ; C28.1@1053.23,2829.02 1053.56,2868.13 ; P6.1@1053.79,3302.28 pad.1@1042.52,3307.09 ; C28.1@1055.06,2829.02 cw(c1153.11,2829.02) 1083.78,2898.35 ; C28.1@1061.03,2829.73 1053.56,2868.13 ; C28.1@1061.06,2829.02 cw(c1173.6,2829.02) 1094.02,2908.59 ; C28.1@1066.87,2831.35 1053.56,2868.13 ; C28.1@1067.06,2829.02 cw(c1194.08,2829.02) 1104.27,2918.83 ; C28.1@1072.46,2833.88 1053.56,2868.13 ; C28.1@1073.06,2829.02 cw(c1214.57,2829.02) 1114.51,2929.08 ; key1.2@1150.36,2950.21 ccw(c1142.52,2949.18) 1142.52,2957.09 ; key1.2@1151.46,2963.73 cw(c1142.52,2966.42) 1142.52,2957.09 ; key1.2@1155.02,2937.46 key1.2@1167.45,2925.69 ; key1.2@1157.52,2934.83 key1.2@1172.16,2930.09 ; key1.2@1157.52,2957.09 1142.52,2957.09 ; key1.2@1160.88,2933.43 key1.2@1176,2935.04 ; key1.2@1162.71,2950.9 key1.2@1181.07,2946.1 ; key1.2@1164,2933.4 key1.2@1178.98,2940.42 ; key1.2@1165.71,2950.3 key1.2@1178.98,2940.42 ; key1.2@1166.33,2934.14 key1.2@1181.07,2946.1 ; key1.2@1168.69,2948.38 key1.2@1176,2935.04 ; key1.2@1170.68,2945.41 key1.2@1172.16,2930.09 ; key1.2@1171.33,2942.37 key1.2@1167.45,2925.69 ; key1.2@1171.41,2984.88 1142.52,2957.09 ; key1.2@1175.49,2979.89 1142.52,2957.09 ; key1.2@1178.64,2974.47 1142.52,2957.09 ; key1.2@1180.88,2968.75 1142.52,2957.09 ; key1.2@1182.19,2962.84 1142.52,2957.09 ; -2442.78,2877.38 P2.2@-2477.48,2922.09 -2424.09,2905 ; -2325,2788.24 R25.2@-2317.48,2745.04 -2295,2696.51 ; C45.2@-2269.91,3523.56 -2247.17,3506.77 ; C45.2@-2269.93,3523.58 -2247.48,3506.77 ; C45.2@-2269.91,3523.56 -2247.17,3506.77 ; C45.2@-2269.93,3523.58 -2247.48,3506.77 ; C45.2@-2267.8,3526.1 -2247.17,3506.77 ; C45.2@-2267.8,3526.1 -2236.64,3496.24 ; C45.2@-2267.8,3526.1 -2247.48,3506.77 ; C45.2@-2267.8,3526.1 -2247.17,3506.77 ; C45.2@-2267.8,3526.1 -2247.48,3506.77 ; C45.2@-2265.4,3528.38 -2247.17,3506.77 ; C45.2@-2265.38,3528.36 -2247.48,3506.77 ; C45.2@-2265.4,3528.38 -2247.17,3506.77 ; C45.2@-2265.38,3528.36 -2247.48,3506.77 ; -2247.48,3506.77 -2273,3518.39 -2247.48,3506.77 ; -2247.48,3506.77 -2260.35,3531.69 -2247.48,3506.77 ; -2247.48,3506.77 -2274.92,3512.55 -2247.48,3506.77